# Altium PCB SparkControl_V0.1.PcbDoc (part 2 of 2)
Units mil, origin at the board's own origin, x right, y up, seen from the top; angles counter-clockwise.
Board outline 3543.31 x 2051.35 mil, 2 copper layers (Top Layer, Bottom Layer), stack 61.811 mil thick; 57 components, 42 nets, 228 pads, 73 vias.
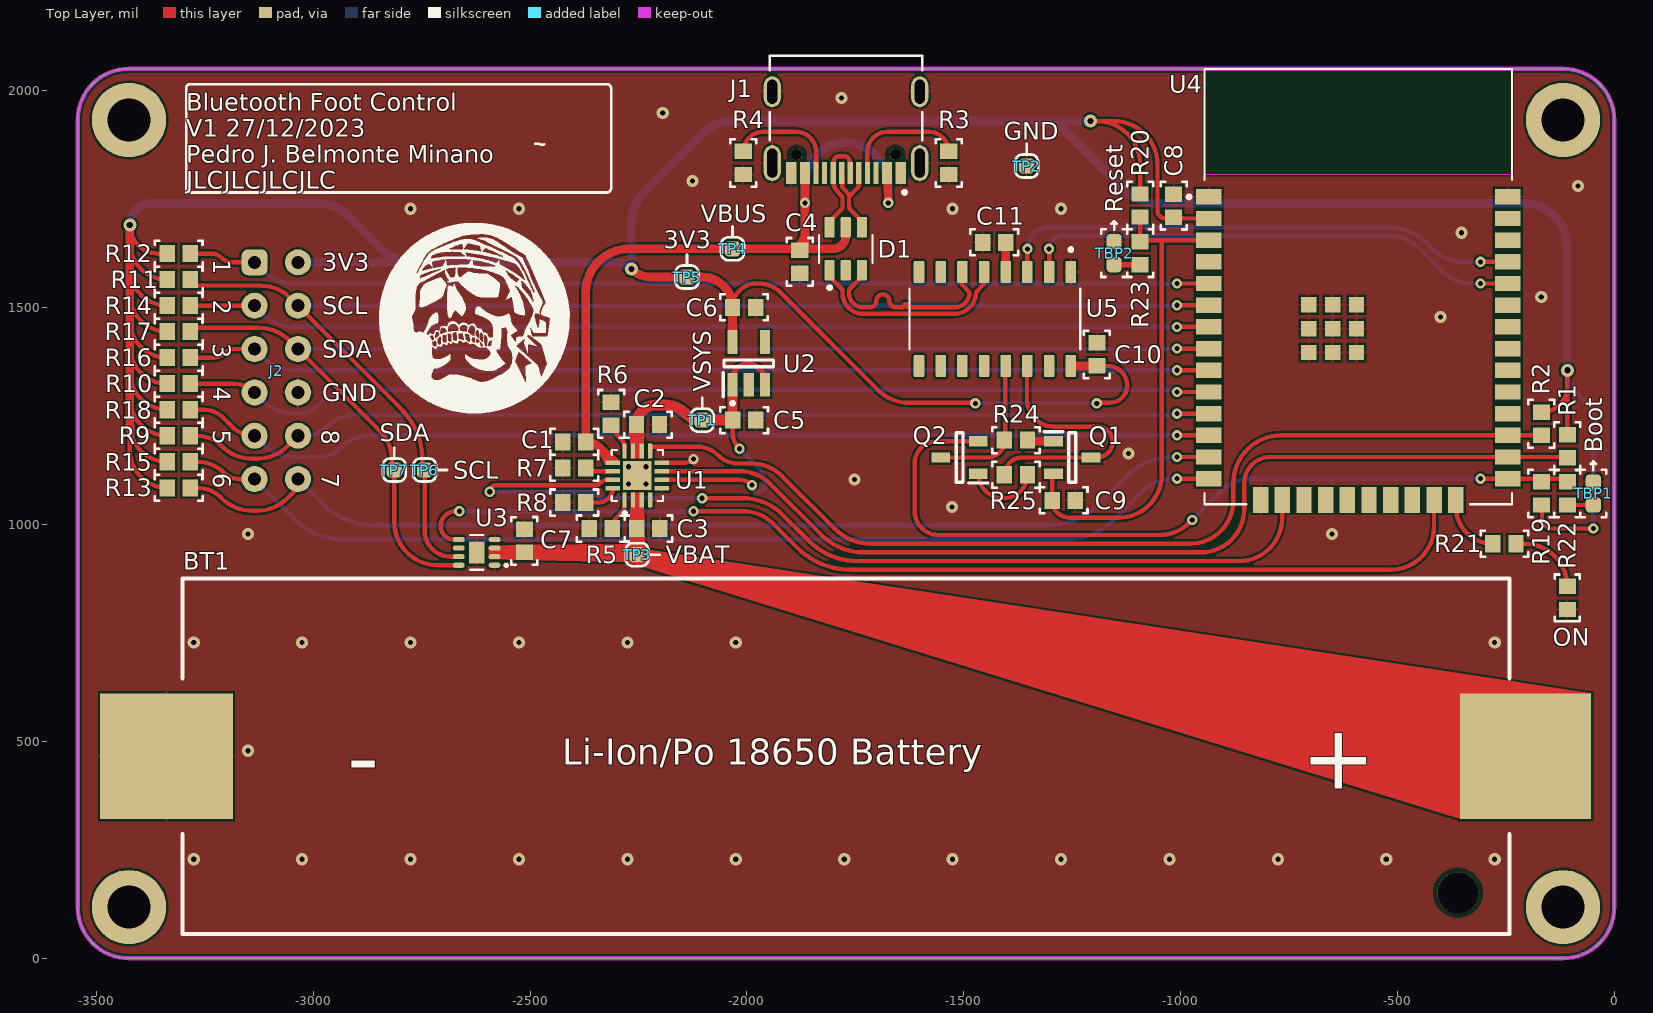
[diagram p0: Top Layer view]

## Silkscreen, mask and mechanical layers (free items; w line width, h text height) (continued)
Mechanical 16: (continued)
  lines w10: 1483.97,-3000.64 cw(c1490.81,-3004.79) 1496.47,-2999.13 ccw(c1502.13,-2993.47) 1509.33,-2996.94 ; -7295.79,-3568.19 4387.13,-3568.19 4387.13,4689.53 -7295.79,4689.53 -7295.79,-3568.19 ; -7084.87,-3360.47 4180.13,-3360.47 4180.13,4484.53 -7084.87,4484.53 -7084.87,-3360.47
  text "Designer's signature:" at -1629.87,-2500.47 h40
  text "-" at 1990.13,-2550.47 h40
  text "Sheet title: Keyboard PCB" at -499.87,-2580.47 h40
  text "-" at 1990.13,-2650.47 h40
  text "-" at 1990.13,-2740.47 h40
  text "Project title: Wireless Keyboard" at -499.87,-2830.47 h40
  text "-" at 1990.13,-2830.47 h40
  text "-" at 1990.13,-2930.47 h40
  text "Supervisor's signature:" at -1619.87,-2990.47 h40
  text "-" at 1990.13,-3030.47 h40
  text "Designer: Pedro Javier Belmonte Minano" at -499.87,-3060.47 h40
  text "Date: '.ProjectDate'" at 1970.13,-3220.47 h40
  text "Supervisor:" at -499.87,-3290.47 h40
  text "Revision: '.ProjectRev'" at 2555.13,-3315.47 h40
  text "Sheet 1 of 1" at 1970.13,-3320.47 h40

## Dimensions
-3425.2,0 to -3425.2,2051.35 on Mechanical 16
-3543.31,1933.24 to 0,1933.24 on Mechanical 16

## Text inside footprints (layer, text, board x,y; h text height)
BT1: Top Overlay "+" at -721.64,391.02 h150; Top Overlay "-" at -2921.64,391.02 h150; Top Overlay "Li-Ion/Po 18650 Battery" at -2426.44,446.01 h60; Mechanical 13 "-" at -3396.65,441 h70; Mechanical 13 "+" at -196.65,436 h70
J2: Top Overlay "1" at -3230.36,1611.66 h40 r270; Top Overlay "2" at -3230.36,1518.33 h40 r270; Top Overlay "3" at -3230.36,1418.33 h40 r270; Top Overlay "4" at -3230.36,1318.33 h40 r270; Top Overlay "5" at -3230.36,1218.33 h40 r270; Top Overlay "6" at -3230.36,1118.33 h40 r270; Top Overlay "7" at -2980.36,1118.33 h40 r270; Top Overlay "GND" at -2979.37,1285.01 h40; Top Overlay "SCL" at -2979.37,1485.01 h40; Top Overlay "8" at -2980.36,1218.33 h40 r270; Top Overlay "SDA" at -2979.37,1385.01 h40; Top Overlay "3V3" at -2979.37,1585.01 h40
U4: Mechanical 13 "ANTENNA" at -826.77,1903.24 h70